# EAGLE board pc_ads1292r_shield_v3.1 (EAGLE 6.6.0)
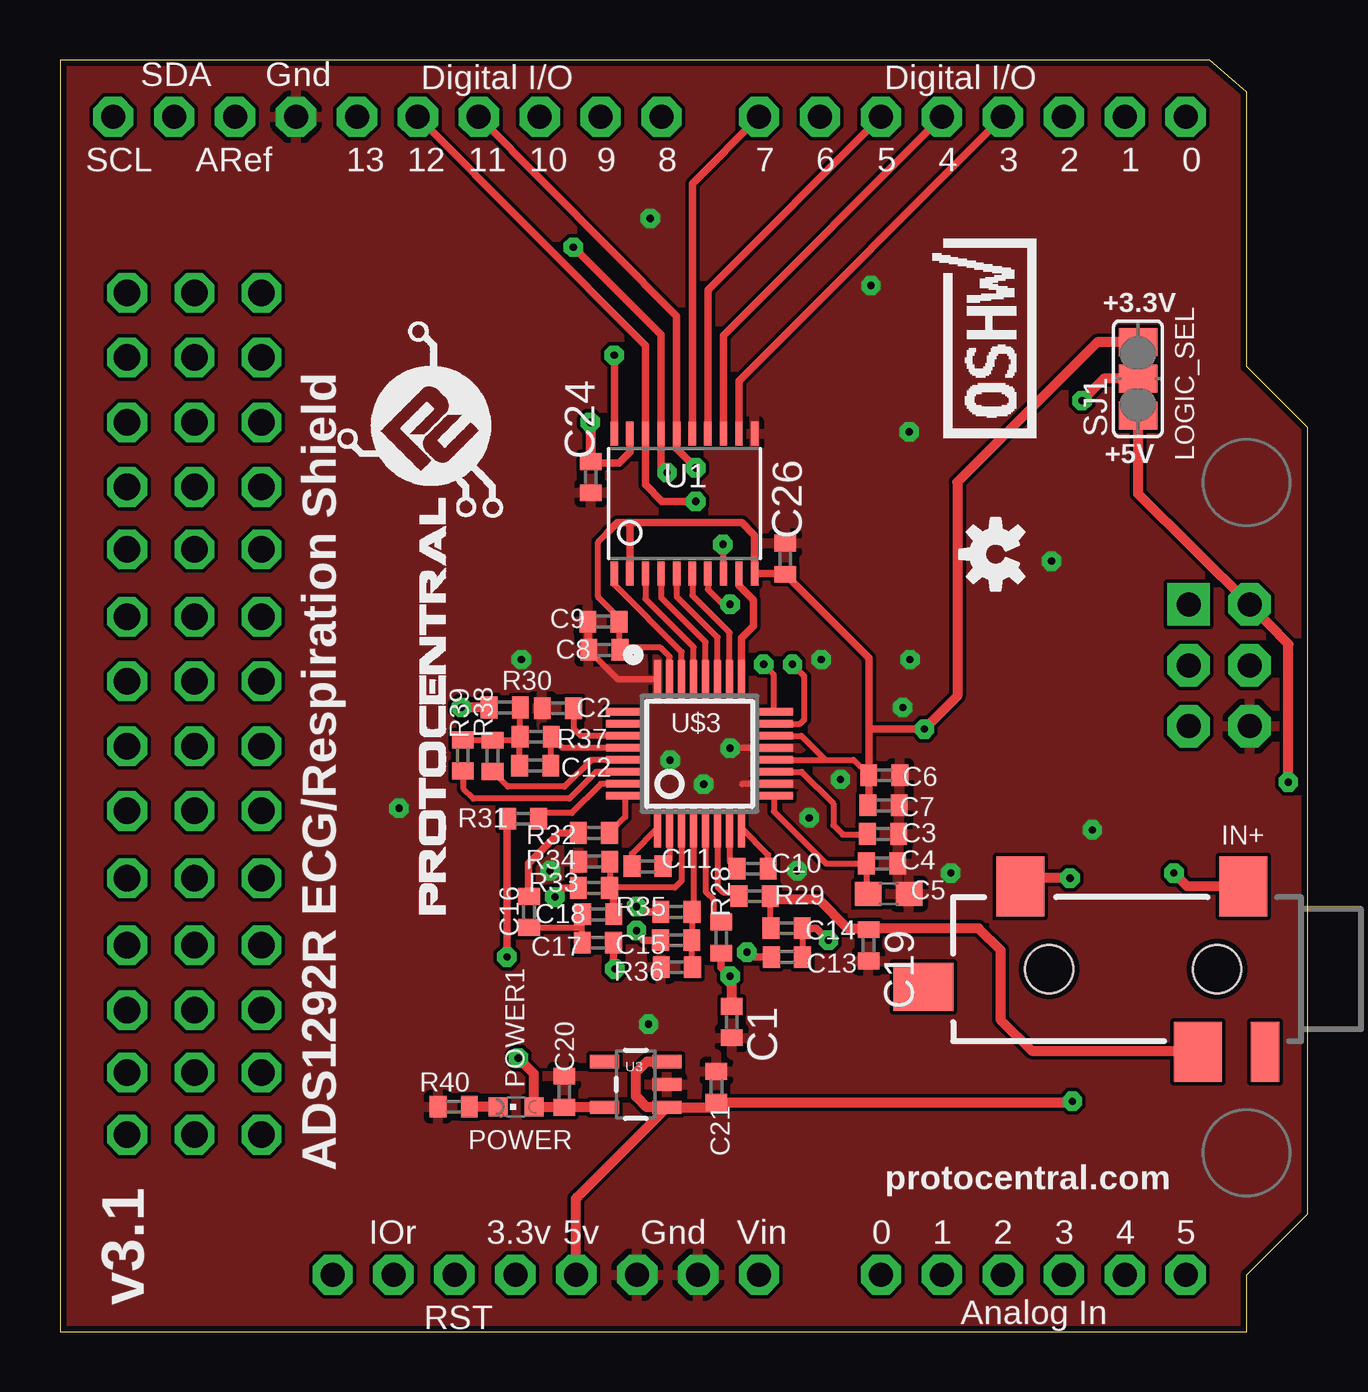
[diagram p0: board, top side]
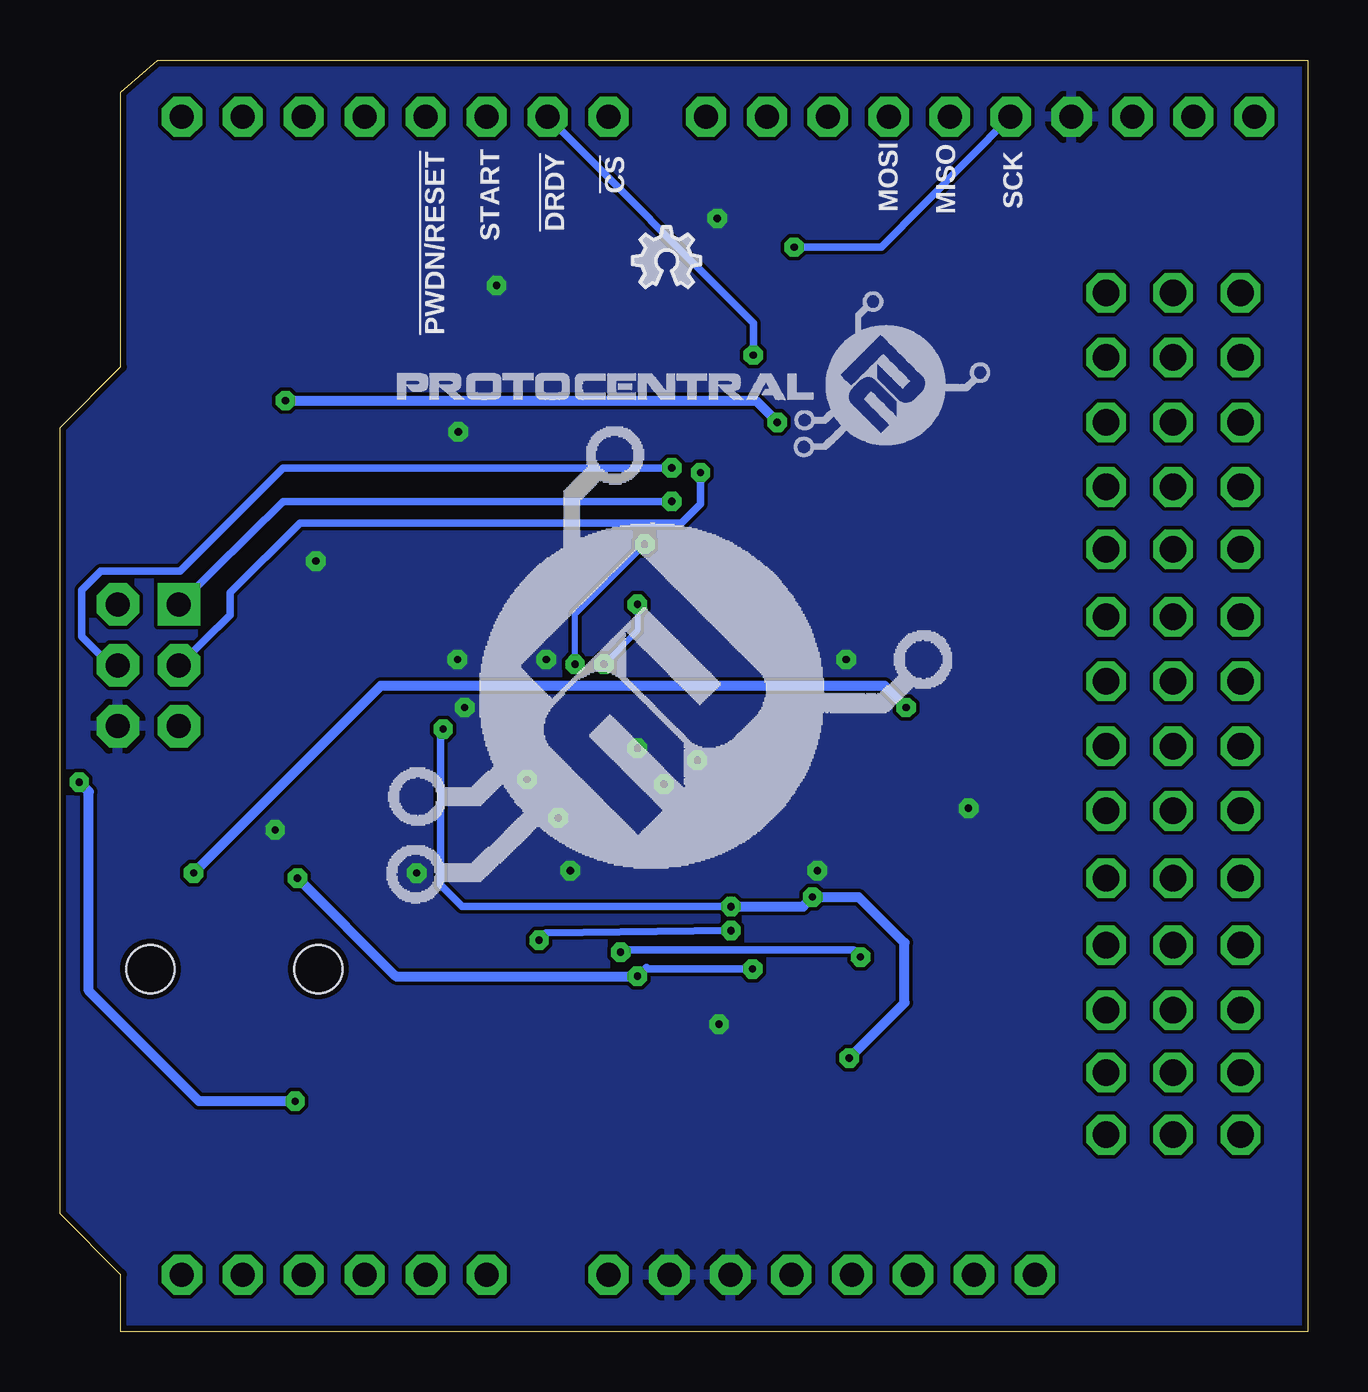
[diagram p1: board, bottom side, seen from below]

Size 52 x 53 mm. Coordinates in mm from the lower left corner, seen from the top.
Copper layers (1*2*15*16): Top 0.035mm / dielectric 1.5mm / Route2 0.035mm / dielectric 0.15mm / Route15 0.035mm / dielectric 0.2mm / Bottom 0.035mm
Design rules "Circuitects-Rules": minimum track width 6mil, minimum drill 0.3mm, track to track 6mil, track to pad 6mil, pad to pad 6mil, via to via 6mil, smd to smd 6mil, copper to edge 10mil, drill to drill 8mil, minimum pad ring 12mil, minimum via ring 10mil, stop-mask expansion 4mil, vias tented up to drill 25mil, thermal gap 10mil
Net classes: 2 gnd: width 0.102 mm, drill 0.1 mm

## Footprints (pad centres in the part's own frame; a part is rotated, then mirrored left to right if it is on the bottom)
C0402 = smd 0.7 x 0.9: 1 -0.65,0; 2 0.65,0
C0603 = smd 1.1 x 1: 1 -0.85,0; 2 0.85,0
AUDIO-JACK-3.5MM-SMD = smd 2 x 2.5: RING 4.3,3.45; SLEEVE 2.4,-3.45; TIP 11.7,-3.45 | smd 1.2 x 2.5: RSH 1.5,3.45 | smd 2.5 x 2: TSH 15.75,0.75 | hole 2: 3.5,0; 10.5,0
ARDUINO = drill 1 pad 1.676 octagon: 3V 18.98,2.37; 5V 21.52,2.37; A0 34.22,2.37; A1 36.76,2.37; A2 39.3,2.37; A3 41.84,2.37; A4 44.38,2.37; A5 46.92,2.37; AREF 7.296,50.63; D0 46.92,50.63; D1 44.38,50.63; D2 41.84,50.63; D3 39.3,50.63; D4 36.76,50.63; D5 34.22,50.63; D6 31.68,50.63; D7 29.14,50.63; D8 25.076,50.63; D9 22.536,50.63; D10 19.996,50.63; D11 17.456,50.63; D12 14.916,50.63; D13 12.376,50.63; GND 9.836,50.63; GND@1 26.6,2.37; GND@2 24.06,2.37; IOREF 13.9,2.37; RESERVED 11.36,2.37; RESET 16.44,2.37; SCL 2.216,50.63; SDA 4.756,50.63; VIN 29.14,2.37 | drill 1 pad 1.778 octagon: 5V_ICSP 49.587,30.31; GND@3 49.587,25.23; MOSI 49.587,27.77; RESET_ICSP 47.047,25.23; SCK 47.047,27.77 | drill 1 pad 1.778 square: MISO 47.047,30.31
CHIPLED_0603 = smd 0.8 x 0.8: A 0,-0.75; C 0,0.75
R0402 = smd 0.7 x 0.9: 1 -0.65,0; 2 0.65,0
SJ_2 = smd 1.168 x 1.6: 1 -1.524,0; 2 0,0; 3 1.524,0
TSSOP20 = smd 0.305 x 0.991: 1 -2.925,-2.918; 2 -2.275,-2.918; 3 -1.625,-2.918; 4 -0.975,-2.918; 5 -0.325,-2.918; 6 0.325,-2.918; 7 0.975,-2.918; 8 1.625,-2.918; 9 2.275,-2.918; 10 2.925,-2.918; 11 2.925,2.918; 12 2.275,2.918; 13 1.625,2.918; 14 0.975,2.918; 15 0.325,2.918; 16 -0.325,2.918; 17 -0.975,2.918; 18 -1.625,2.918; 19 -2.275,2.918; 20 -2.925,2.918
SOT23-5 = smd 0.55 x 1.2: 1 -0.95,-1.3; 2 0,-1.3; 3 0.95,-1.3; 4 0.95,1.3; 5 -0.95,1.3
SQFP-S-5X5-32 = smd 0.3 x 1.6: 1 -1.75,-3.1; 2 -1.25,-3.1; 3 -0.75,-3.1; 4 -0.25,-3.1; 5 0.25,-3.1; 6 0.75,-3.1; 7 1.25,-3.1; 8 1.75,-3.1; 17 1.75,3.1; 18 1.25,3.1; 19 0.75,3.1; 20 0.25,3.1; 21 -0.25,3.1; 22 -0.75,3.1; 23 -1.25,3.1; 24 -1.75,3.1 | smd 1.6 x 0.3: 9 3.1,-1.75; 10 3.1,-1.25; 11 3.1,-0.75; 12 3.1,-0.25; 13 3.1,0.25; 14 3.1,0.75; 15 3.1,1.25; 16 3.1,1.75; 25 -3.1,1.75; 26 -3.1,1.25; 27 -3.1,0.75; 28 -3.1,0.25; 29 -3.1,-0.25; 30 -3.1,-0.75; 31 -3.1,-1.25; 32 -3.1,-1.75

## Placement (x,y rotation side)
C1  47pF  [C0402]  28,12.9 270 top
C2  1u, NP0/C0G  [C0402]  20.75,25.98 0 top
C3  1u, NP0/C0G  [C0402]  34.31,20.74 180 top
C4  100n  [C0402]  34.27,19.51 180 top
C5  10u  [C0603]  34.54,18.25 0 top
C6  100n  [C0402]  34.36,23.19 180 top
C7  1u  [C0402]  34.33,21.93 180 top
C8  100n  [C0402]  22.69,28.41 0 top
C9  1u  [C0402]  22.65,29.59 0 top
C10  47n  [C0402]  28.87,19.29 0 top
C11  47n  [C0402]  24.49,19.39 0 top
C12  47p  [C0402]  19.81,23.59 0 top
C13  2.2n  [C0402]  30.3,15.61 180 top
C14  100n  [C0402]  30.29,16.81 0 top
C15  2.2n  [C0402]  25.68,16.31 0 top
C16  2.2n  [C0402]  19.55,17.49 90 top
C17  100n  [C0402]  22.42,16.21 180 top
C18  2.2n  [C0402]  22.43,17.39 0 top
C19  47pF  [C0402]  33.7,16.1 270 top
C20  1u  [C0402]  21.02,10 270 top
C21  1u  [C0402]  27.36,10.2 270 top
C24  100n  [C0402]  22.13,35.61 90 top
C26  100n  [C0402]  30.23,32.21 270 top
JP5  502-35RASMT4BHNTRX  [AUDIO-JACK-3.5MM-SMD]  51.73,15.11 180 top
LOGO1  OSHW_LOGO_FILLX0100-NT  [OSHW_FILLX100_NOTEXT]  28.13,43.51 0 bottom
M1  ARDUINO  [ARDUINO]  0,0 0 top
POWER1  Red  [CHIPLED_0603]  19.01,9.37 90 top
R28  51K  [R0402]  27.56,16.42 90 top
R29  51K  [R0402]  28.95,18.15 180 top
R30  100k  [R0402]  18.54,26.01 0 top
R31  40.2k  [R0402]  19.3,21.38 0 top
R32  40.2k  [R0402]  22.25,20.78 0 top
R33  10M  [R0402]  22.25,18.49 0 top
R34  10M  [R0402]  22.27,19.59 0 top
R35  10M  [R0402]  25.69,17.49 0 top
R36  10M  [R0402]  25.71,15.19 0 top
R37  1M  [R0402]  19.83,24.79 0 top
R38  100K  [R0402]  18.03,24 270 top
R39  0R  [R0402]  16.79,24.01 270 top
R40  330R  [R0402]  16.41,9.37 0 top
SJ1  [SJ_2]  44.93,39.71 90 top
U1  TXB0108PWR  [TSSOP20]  26.03,34.51 0 top
U3  AP2112K-3.3V  [SOT23-5]  24,10.3 90 top
U$1  [CERT-SMALL-SILK]  40.7,41.4 90 top
U$2  [PROTY-LOGO-LARGE]  38.6,17.5 0 bottom
U$3  ADS1292R-TQFP  [SQFP-S-5X5-32]  26.66,24.08 0 top
U$4  PROTY_LOGO_WITH_TEXT  [PROTY_WITH_TEXT]  18.1,17.4 90 top
U$5  [PROTY_WITH_TEXT]  37.93,36.81 0 bottom
U$6  OSHW-LOGOS  [OSHW-LOGO-S]  39,32.4 90 top

## Library data of the parts
C1-C4 C6-C21 C24 C26 R28-R40 = rcl
C5 = resistor
JP5 = SparkFun-Connectors; PROD_ID: CONN-10353
LOGO1 = ohw-logo
M1 U$2-U$5 = circuitects
POWER1 = led
SJ1 = jumper
U1 = adafruit
U3 = SparkFun-PowerIC; PROD_ID: VREG-12457
U$1 = OSHWA
U$6 = SparkFun

## Nets
3V: M1.3V
!ADS_DRDY: U1.1 U$3.22
!ARD_DRDY: M1.D6 U1.20
+3V3: C6.2 C7.2 C8.2 C9.2 C20.2 C26.2 POWER1.A R33.1 R35.1 SJ1.3 U1.2 U1.10 U3.5 U$3.12 U$3.14 U$3.23
+5V: C21.2 M1.5V M1.5V_ICSP SJ1.1 U3.1 U3.3
ADS_CLK: U1.9 U$3.17
ADS_PWDN: U1.8 U$3.15
ADS_START: U1.7 U$3.16
ARD_CLK: M1.D3 U1.12
ARD_CS0: M1.D7 U1.15
ARD_MISO: M1.D12 M1.MISO U1.18
ARD_MOSI: M1.D11 M1.MOSI U1.16
ARD_PWDN: M1.D4 U1.13
ARD_SCK: M1.D13 M1.SCK U1.17
ARD_START: M1.D5 U1.14
GND: C1.2 C2.1 C3.1 C4.1 C5.2 C6.1 C7.1 C8.1 C9.1 C19.2 C20.1 C21.1 C24.1 C26.1 M1.GND M1.GND@1 M1.GND@2 M1.GND@3 R34.1 R36.1 R40.1 U1.11 U3.2 U$3.10 U$3.13 U$3.24
N$102: C2.2 U$3.27
N$105: C3.2 U$3.11
N$106: C4.2 C5.1 U$3.9
N$108: C10.2 U$3.8
N$109: C10.1 U$3.7
N$110: C11.2 U$3.2
N$111: C11.1 U$3.1
N$112: C14.1 C19.1 JP5.RING R29.1
N$113: R39.2 U$3.30
N$114: JP5.SLEEVE R30.1
N$115: R31.2 U$3.31
N$116: C13.2 R31.1
N$117: C13.1 C14.2 C15.1
N$118: R32.2 U$3.32
N$119: C16.2 R32.1
N$120: C16.1 C17.2 C18.1
N$121: C1.1 C17.1 JP5.TIP R28.1
N$122: C18.2 R33.2 R34.2 U$3.3
N$123: C15.2 R35.2 R36.2 U$3.4
N$124: R29.2 U$3.6
N$125: R28.2 U$3.5
N$126: C12.2 R37.2 U$3.28
N$127: R38.2 U$3.29
N$128: C12.1 R30.2 R37.1 R38.1 R39.1
N$131: POWER1.C R40.2
SPI_CS0: U1.6 U$3.18
SPI_MISO: U1.3 U$3.21
SPI_MOSI: U1.5 U$3.19
SPI_SCK: U1.4 U$3.20
VCC: C24.2 SJ1.2 U1.19
VIN: M1.VIN

## Tracks (layer width: path | path; a pad name or v marks a point on that pad's centre or on a via)
!ADS_DRDY
  Top 0.254: U1.1 23.11,31.14 25.91,28.33 U$3.22
!ARD_DRDY  (via drill 0.3)
  Top 0.305: U1.20 v23.11,40.7 v23.1,40.7
  Bottom 0.305: v23.1,40.7 23.1,42.04 M1.D6
+3V3  (via drill 0.3)
  Top 0.254: U$3.23 25.41,28.13 25.03,28.51 23.74,28.51 C8.2 23.3,28.45 C9.2 23.3,29.74 22.43,30.61 22.43,32.91 22.83,33.31 | U$3.12 31.9,23.83 | 31.9,23.83 33.07,23.83 C6.2 | U$3.14 30.9,24.83 31.9,23.83
  Top 0.305: 23.63,33.71 28.43,33.71 28.95,33.19 U1.10 30.2,31.59 C26.2 33.71,28.08 33.71,25.2 | 36.05,25.13 v36.03,25.11 33.8,25.11 33.71,25.2 | U1.2 23.75,33.59 23.63,33.71 | 23.63,33.71 23.23,33.71 22.83,33.31 | R33.1 21.01,18.49 v20.63,18.11 | 33.71,25.2 C6.2 33.71,21.96 C7.2 | R35.1 24.25,17.49 v24.03,17.71
  Top 0.406: SJ1.3 43.23,41.23 37.4,35.4 37.4,26.48 v36.03,25.11 | v19.1,11.4 19.76,10.74 POWER1.A 19.78,9.35 C20.2 U3.5
  Bottom 0.305: v36.03,25.11 36.13,25.01 36.13,18.61 35.23,17.71 v24.03,17.71
  Bottom 0.406: v19.1,11.4 16.8,13.7 16.8,16.2 18.71,18.11 v20.63,18.11 21.03,17.71 v24.03,17.71
+5V  (via drill 0.3)
  Top 0.406: U3.1 24.45,9.35 24,9.8 24,10.8 24.45,11.25 U3.3 | U3.1 27.16,9.35 C21.2 42.15,9.55 v42.2,9.6 | 21.5,5.55 21.52,5.57 | U3.1 21.62,5.67 21.52,5.57 | v51.2,22.9 51.2,28.65 M1.5V_ICSP 44.93,34.92 SJ1.1 | M1.5V 21.52,5.57
  Bottom 0.406: v42.2,9.6 46.2,9.6 50.8,14.2 50.8,22.5 v51.2,22.9
ADS_CLK
  Top 0.305: U$3.17 28.41,28.91 28.9,29.4 28.9,30.5 28.3,31.09 U1.9
ADS_PWDN  (via drill 0.3)
  Top 0.254: U1.8 27.66,32.78 v27.63,32.81 | U$3.15 30.85,25.33 31.03,25.51 31.03,27.31 v30.53,27.81
  Bottom 0.254: v30.53,27.81 30.53,29.91 v27.63,32.81
ADS_START  (via drill 0.3)
  Top 0.254: U1.7 27,30.93 27.63,30.31 v27.93,30.31 | U$3.16 29.76,27.38 v29.33,27.81
  Bottom 0.254: v27.93,30.31 27.93,29.21 v29.33,27.81
ARD_CLK
  Top 0.305: U1.12 28.3,39.62 M1.D3
ARD_CS0
  Top 0.305: U1.15 26.36,47.84 M1.D7
ARD_MISO  (via drill 0.3)
  Top 0.305: v26.5,34.6 25.1,34.6 24.4,35.3 U1.18 24.41,41.09 M1.D12
  Bottom 0.305: v26.5,34.6 42.71,34.6 M1.MISO
ARD_MOSI  (via drill 0.3)
  Top 0.305: v26.5,36 25.7,36.8 U1.16 25.7,42.33 M1.D11
  Bottom 0.305: v26.5,36 42.7,36 47,31.7 50.3,31.7 51.1,30.9 51.1,28.97 49.87,27.74 M1.MOSI
ARD_PWDN
  Top 0.305: U1.13 27.66,41.52 M1.D4
ARD_SCK  (via drill 0.3)
  Top 0.305: v21.4,45.2 25.05,41.55 U1.17 25.05,36.05 v25.3,35.8
  Bottom 0.305: v25.3,35.8 25.3,34.5 26.1,33.7 42,33.7 44.9,30.8 44.9,29.87 M1.SCK | M1.D13 17.76,45.2 v21.4,45.2
ARD_START
  Top 0.305: U1.14 27,43.41 M1.D5
GND  (via drill 0.3)
  Top 0.2: v26.83,22.81 26.93,22.81 27.13,23.01
  Top 0.254: U$3.24 23.27,27.18 C8.1 | U$3.13 27.95,24.33 v27.93,24.31 | U$3.10 28.45,22.83 28.43,22.81
  Top 0.305: C9.1 22,28.45 C8.1
  other vias: 35.4,37.5 33.8,43.6 24.6,46.4 31.73,28.01 30.73,19.21 35.13,26.01 41.33,32.11 14.13,21.81 24.53,12.81 20.43,19.21 32.53,23.01 31.23,21.41 37.13,19.11 19.23,28.01 35.43,28.01 43.03,20.91 25.43,23.81
  pour Top: 0,53 52,53 52,0 0,0
  pour Bottom: 0,53 52,53 52,0 0,0
N$20  (via drill 1.1)
  other vias: 8.4,29.8
N$22  (via drill 1.1)
  other vias: 2.8,16.1
N$23  (via drill 1.1)
  other vias: 2.8,18.9
N$24  (via drill 1.1)
  other vias: 2.8,21.7
N$25  (via drill 1.1)
  other vias: 2.8,27.1
N$27  (via drill 1.1)
  other vias: 2.8,24.4
N$39  (via drill 1.1)
  other vias: 8.4,43.3
N$42  (via drill 1.1)
  other vias: 2.8,29.8
N$44  (via drill 1.1)
  other vias: 2.8,32.6
N$46  (via drill 1.1)
  other vias: 2.8,35.2
N$47  (via drill 1.1)
  other vias: 2.8,37.9
N$48  (via drill 1.1)
  other vias: 2.8,40.6
N$49  (via drill 1.1)
  other vias: 5.6,16.1
N$52  (via drill 1.1)
  other vias: 5.6,18.9
N$53  (via drill 1.1)
  other vias: 5.6,21.7
N$54  (via drill 1.1)
  other vias: 5.6,24.4
N$55  (via drill 1.1)
  other vias: 5.6,27.1
N$56  (via drill 1.1)
  other vias: 5.6,29.8
N$57  (via drill 1.1)
  other vias: 5.6,32.6
N$58  (via drill 1.1)
  other vias: 5.6,35.2
N$59  (via drill 1.1)
  other vias: 5.6,37.9
N$60  (via drill 1.1)
  other vias: 5.6,40.6
N$72  (via drill 1.1)
  other vias: 8.4,32.6
N$73  (via drill 1.1)
  other vias: 8.4,37.9
N$77  (via drill 1.1)
  other vias: 8.4,35.2
N$78  (via drill 1.1)
  other vias: 8.4,40.6
N$80  (via drill 1.1)
  other vias: 2.8,43.3
N$81  (via drill 1.1)
  other vias: 5.6,43.3
N$82  (via drill 1.1)
  other vias: 8.4,27.1
N$83  (via drill 1.1)
  other vias: 8.4,24.4
N$84  (via drill 1.1)
  other vias: 8.4,21.7
N$85  (via drill 1.1)
  other vias: 8.4,18.9
N$86  (via drill 1.1)
  other vias: 8.4,16.1
N$89  (via drill 1.1)
  other vias: 2.8,13.4
N$90  (via drill 1.1)
  other vias: 5.6,13.4
N$91  (via drill 1.1)
  other vias: 8.4,13.4
N$94  (via drill 1.1)
  other vias: 2.8,10.8
N$95  (via drill 1.1)
  other vias: 5.6,10.8
N$96  (via drill 1.1)
  other vias: 8.4,10.8
N$99  (via drill 1.1)
  other vias: 2.8,8.2
N$100  (via drill 1.1)
  other vias: 5.6,8.2
N$101  (via drill 1.1)
  other vias: 8.4,8.2
N$102
  Top 0.254: U$3.27 21.71,24.83 21.43,25.11 21.43,25.95 C2.2
N$105
  Top 0.254: U$3.11 30.91,23.33 32.23,22.01 32.23,21.11 32.63,20.71 33.63,20.71 C3.2
N$106
  Top 0.254: U$3.9 29.76,21.68 31.93,19.51 C4.2 33.62,18.32 C5.1
N$108
  Top 0.254: C10.2 29.52,19.87 U$3.8
N$109
  Top 0.254: U$3.7 27.91,19.6 C10.1
N$110
  Top 0.254: U$3.2 25.41,19.66 C11.2
N$111
  Top 0.254: C11.1 23.84,19.91 U$3.1
N$112
  Top 0.254: R29.1 29.6,16.85 C14.1
  Top 0.406: R29.1 29.64,18.01 31.63,18.01 32.83,16.81 33.64,16.81 C19.1 33.76,16.81 38.29,16.81 39.2,15.9 39.2,13 40.5,11.7 47.39,11.7 JP5.RING
N$113
  Top 0.254: U$3.30 22.35,23.33 21.23,22.21 17.23,22.21 16.83,22.61 16.83,23.32 R39.2
N$114  (via drill 0.3)
  Top 0.406: R30.1 v16.73,26.01 | JP5.SLEEVE 46.98,18.56 v46.43,19.11
  Bottom 0.406: v16.73,26.01 17.63,26.91 38.63,26.91 v46.43,19.11
N$115
  Top 0.254: U$3.31 22.55,22.83 21.33,21.61 20.18,21.61 R31.2
N$116  (via drill 0.3)
  Top 0.305: C13.2 28.83,15.61 v28.63,15.81 | v18.63,15.61 18.63,21.36 R31.1
  Bottom 0.305: v28.63,15.81 28.53,15.91 18.93,15.91 v18.63,15.61
N$117  (via drill 0.3)
  Top 0.254: C14.2 C13.1
  Top 0.305: C14.2 31.53,16.81 v32.03,16.31 | C15.1 24.33,16.31 v24.03,16.71
  Bottom 0.305: v24.03,16.71 31.73,16.61 v32.03,16.31
N$118
  Top 0.254: U$3.32 23.56,21.44 R32.2
N$119
  Top 0.305: C16.2 19.53,18.22 19.53,19.51 20.8,20.78 R32.1
N$120
  Top 0.254: C16.1 21.63,16.84 C18.1 21.68,15.9 C17.2
N$121  (via drill 0.3)
  Top 0.305: C17.1 23.07,15.17 v23.13,15.11 | R28.1 27.56,15.18 v27.93,14.81
  Top 0.406: v42.1,18.9 40.37,18.9 JP5.TIP | C1.1 28,14.74 v27.93,14.81
  Bottom 0.305: v23.13,15.11 27.49,15.11 27.56,15.18 v27.93,14.81
  Bottom 0.406: v27.93,14.81 38.01,14.81 v42.1,18.9
N$122
  Top 0.254: U$3.3 25.91,18.79 25.63,18.51 22.92,18.51 | R34.2 22.92,18.51 | 22.92,18.51 R33.2
  Top 0.305: C18.2 23.08,18.47 R33.2
N$123
  Top 0.254: U$3.4 26.41,17.56 R35.2 C15.2 26.33,15.22 R36.2
N$124
  Top 0.254: U$3.6 27.41,18.53 27.63,18.31 28.14,18.31 R29.2
N$125
  Top 0.254: U$3.5 26.91,18.33 27.23,18.01 27.23,17.4 R28.2
N$126
  Top 0.254: C12.2 20.46,24.87 R37.2 20.94,24.33 U$3.28
N$127
  Top 0.254: U$3.29 22.15,23.83 21.03,22.71 18.67,22.71 R38.2
N$128
  Top 0.254: R37.1 19.18,26.1 R30.2 | C12.1 19.16,24.77 R37.1 | R37.1 19.04,24.65 R38.1 R39.1
N$131
  Top 0.406: POWER1.C R40.2
SPI_CS0
  Top 0.254: U1.6 26.36,30.68 27.91,29.13 U$3.18
SPI_MISO
  Top 0.254: U1.3 24.41,30.54 26.41,28.53 U$3.21
SPI_MOSI
  Top 0.254: U1.5 25.7,30.64 27.41,28.93 U$3.19
SPI_SCK
  Top 0.254: U1.4 25.05,30.59 26.91,28.73 U$3.20
VCC  (via drill 0.3)
  Top 0.305: U1.19 23.75,36.66 23.3,36.2 22.19,36.2 C24.2
  Top 0.406: SJ1.2 43.51,39.71 v42.6,38.8 | C24.2 22.13,37.87 v22.1,37.9
  Bottom 0.406: v42.6,38.8 23,38.8 v22.1,37.9

## Text on the board
tPlace: +3.3V | +5V | LOGIC_SEL | IN+ | POWER | ADS1292R ECG/Respiration Shield | protocentral.com | v3.1
bPlace: MISO | MOSI | SCK | !CS | !DRDY | START | !PWDN/RESET